# Altium PCB QSTL_24DC_4MW_PCB.PcbDoc
Units mm, origin at the board's own origin, x right, y up, seen from the top; angles counter-clockwise.
Board outline 19.5 x 67.9 mm, 6 copper layers (L1_GND, L2_DC_A, L3_GND, L4_DC_B, L5_GND, L6_RF_QD), stack 1.588 mm thick; 22 components, 37 nets, 149 pads, 528 vias.
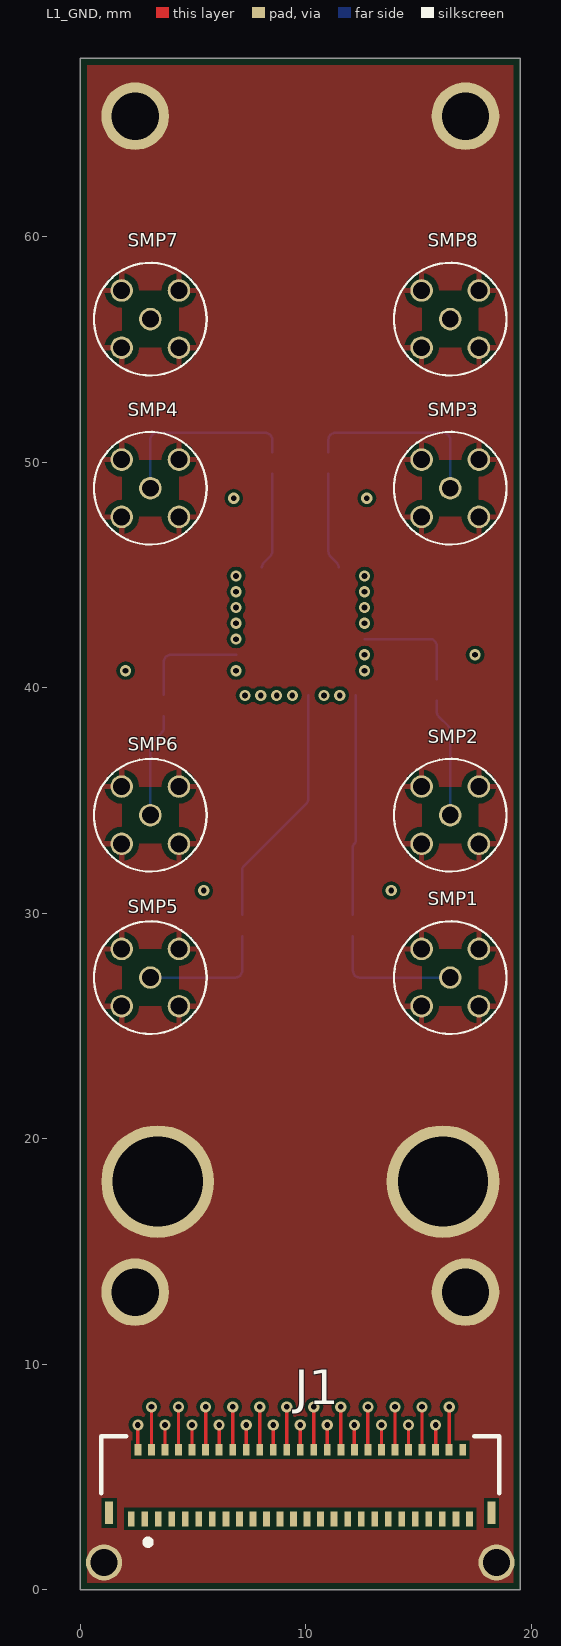
[diagram p0: L1_GND view]
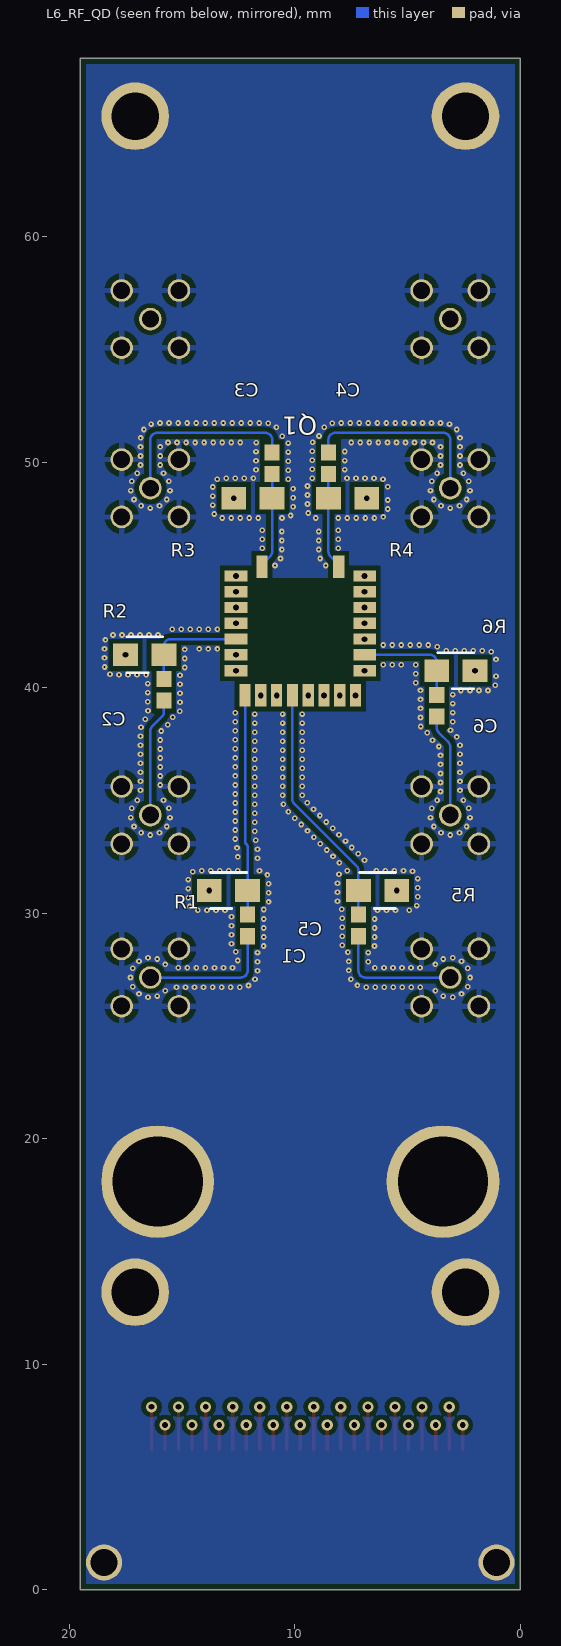
[diagram p1: L6_RF_QD view, seen from below]
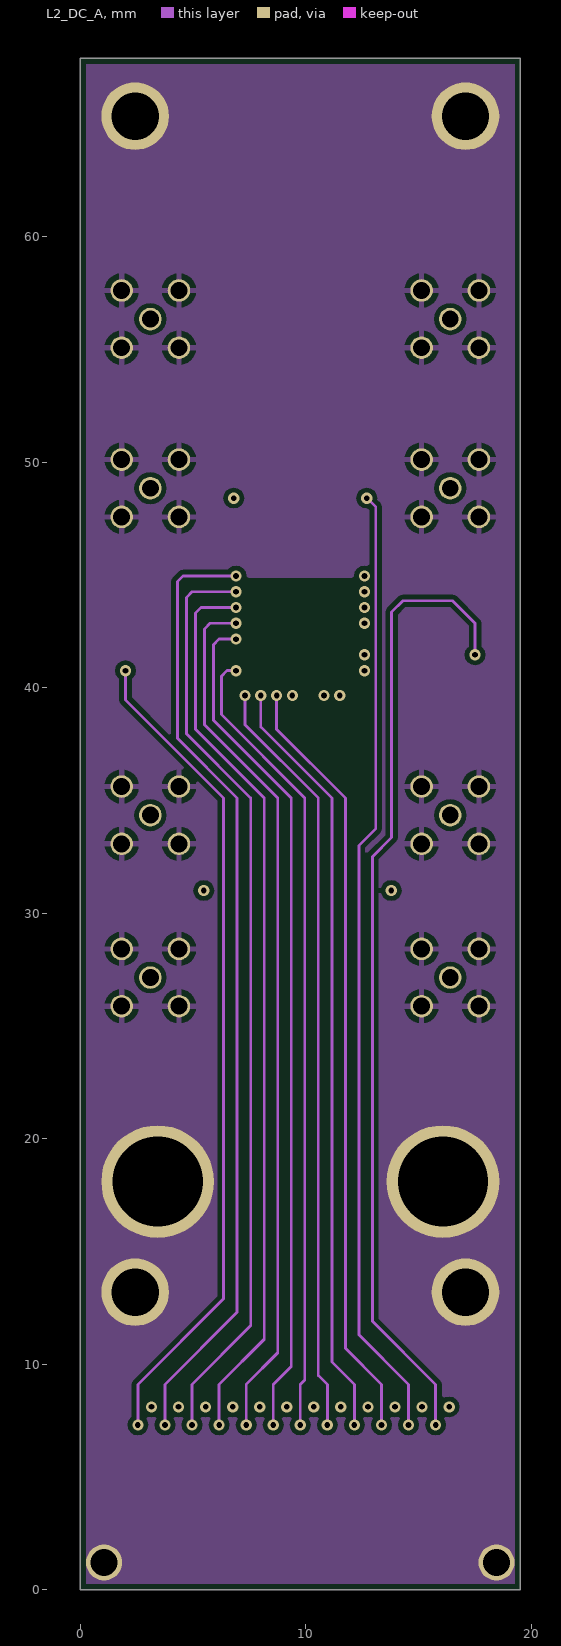
[diagram p2: L2_DC_A]
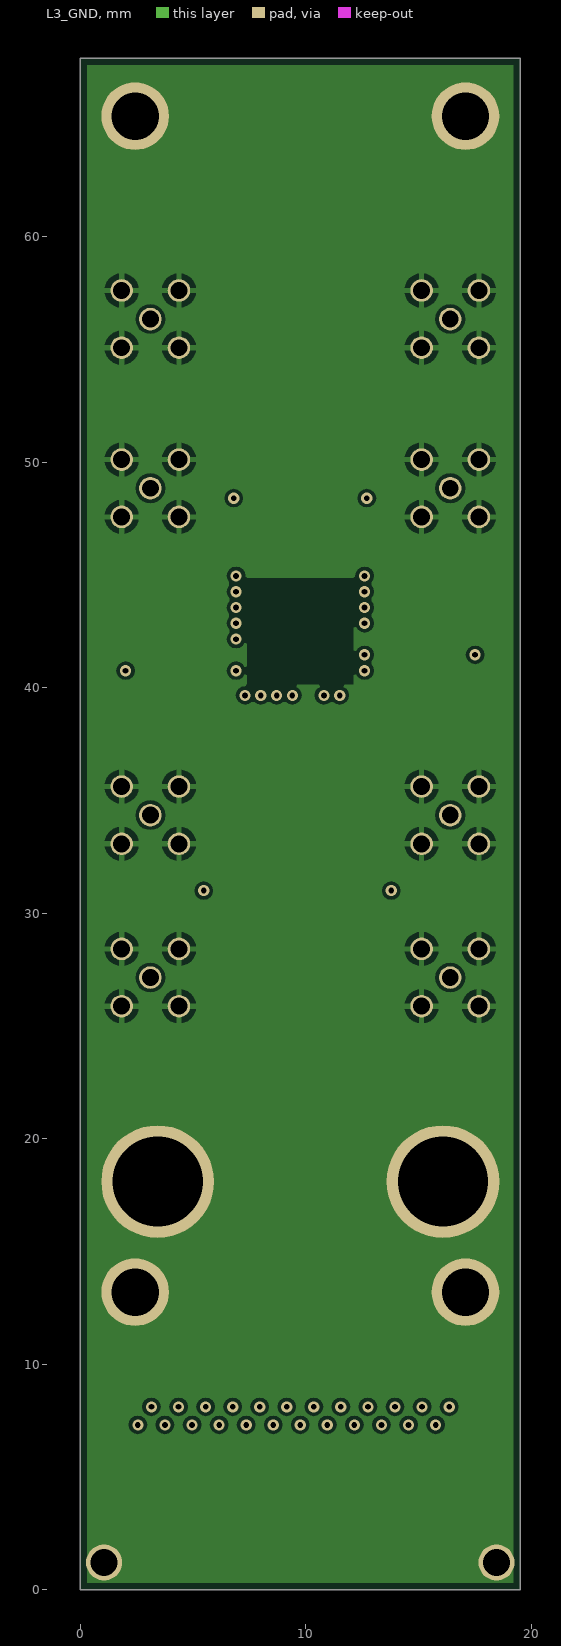
[diagram p3: L3_GND]
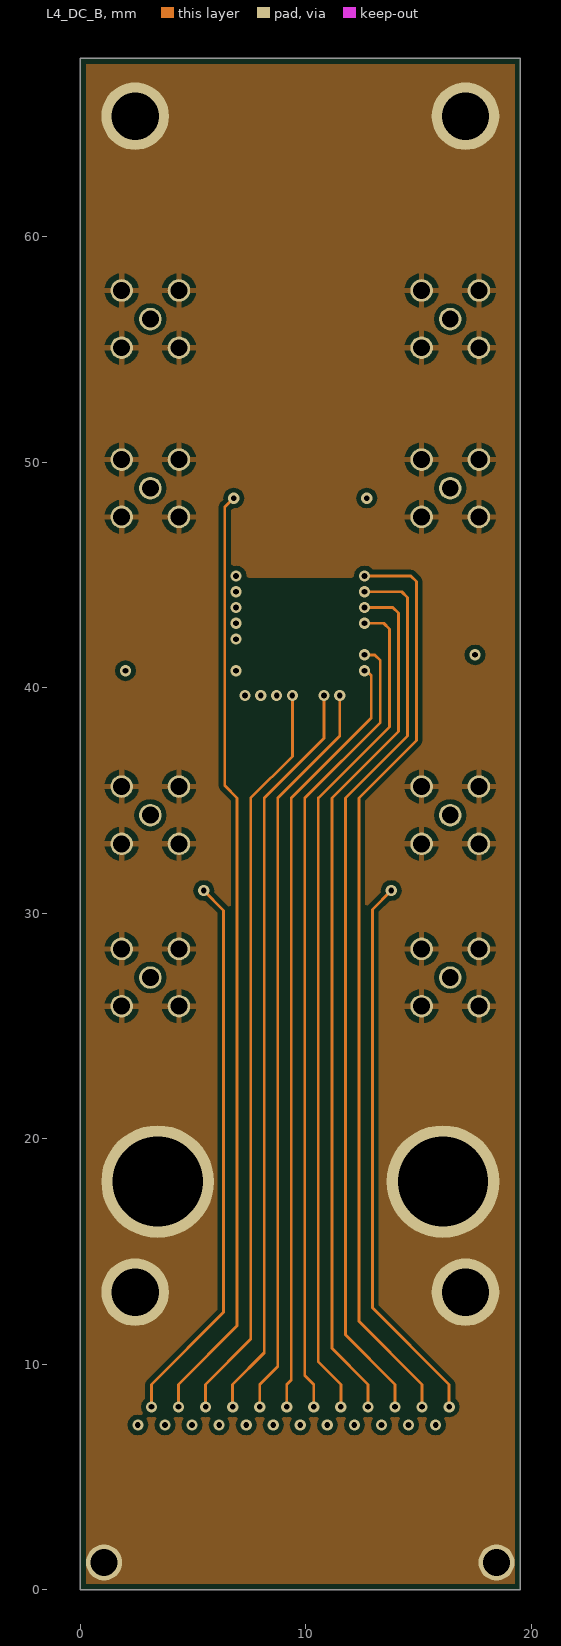
[diagram p4: L4_DC_B]
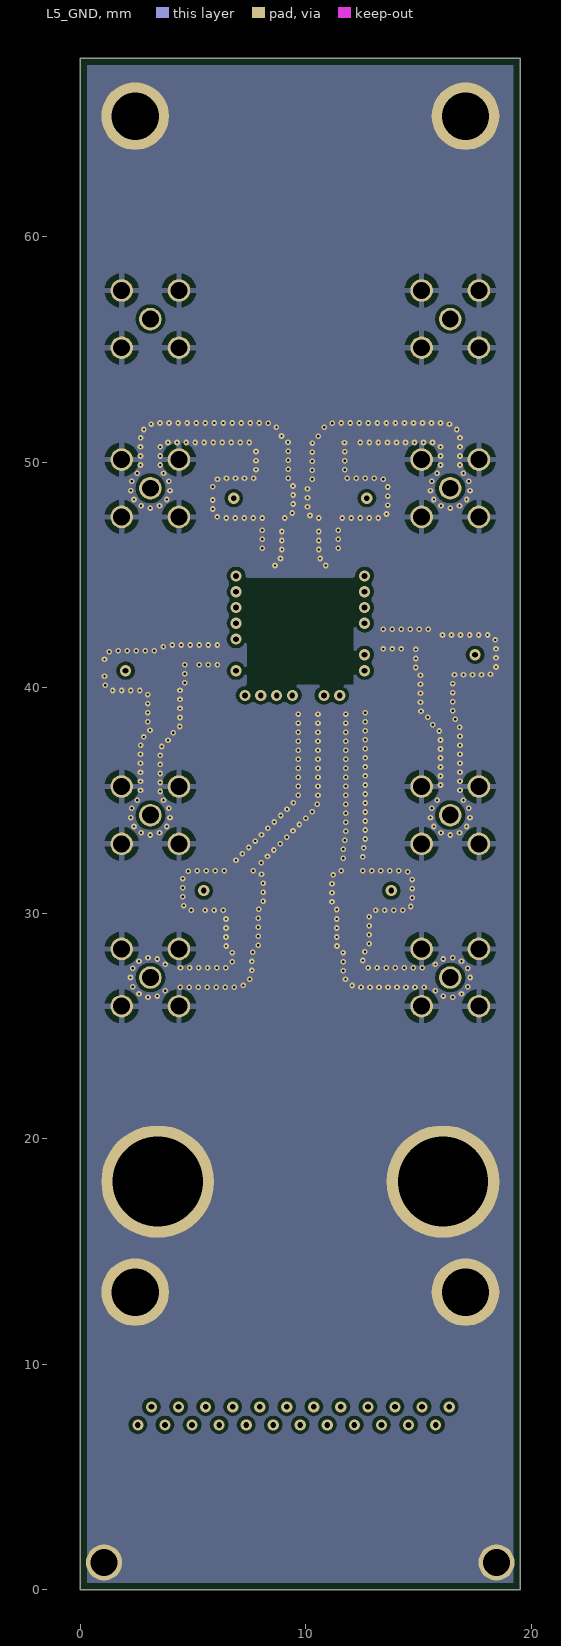
[diagram p5: L5_GND]
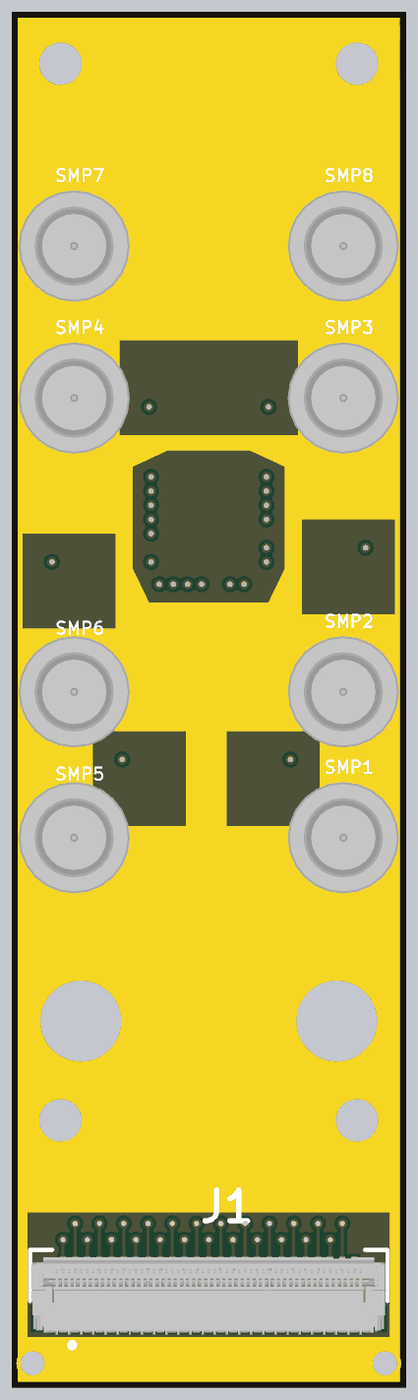
[diagram p6: 3D render of the assembled board from above, using the file's embedded part models]
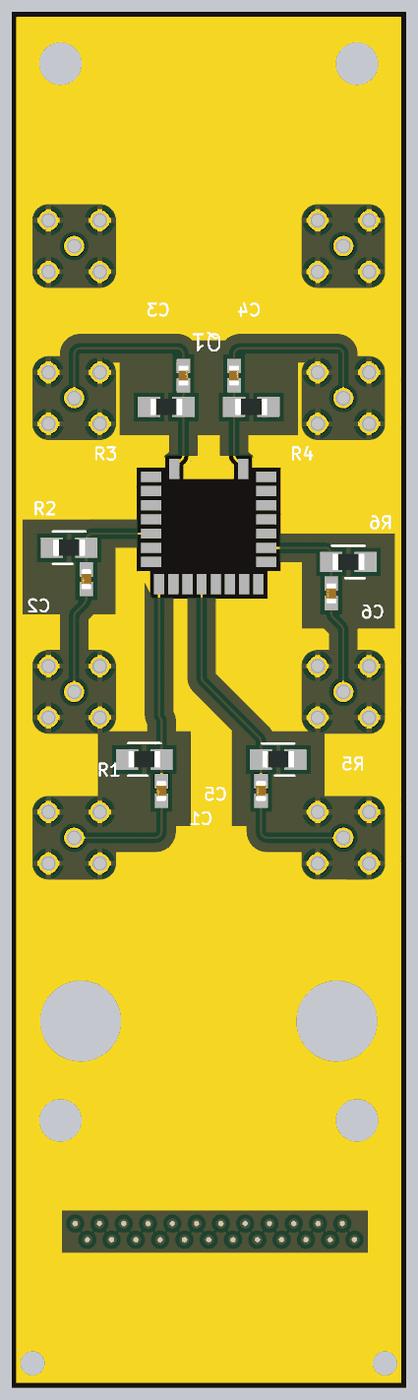
[diagram p7: 3D render of the assembled board from below, using the file's embedded part models]

## Layer stack, top to bottom
Top Solder: solder mask 0.0102, Solder Resist, Dk 3.5
L1_GND: signal copper 0.035
Dielectric 1: dielectric 0.0784, 1078RC69%, Dk 4.8
L2_DC_A: signal copper 0.0152
Dielectric2: dielectric 0.55, 0.55mm H/HOZ CORE, Dk 4.8
L3_GND: signal copper 0.0152
Dielectric3: dielectric 0.2008, 7628RC50%, Dk 4.8
L4_DC_B: signal copper 0.0152
Dielectric4: dielectric 0.55, 0.55mm H/HOZ CORE, Dk 4.8
L5_GND: signal copper 0.0152
Dielectric5: dielectric 0.0784, 1078RC69%, Dk 4.8
L6_RF_QD: signal copper 0.035
Bottom Solder: solder mask 0.0102, Solder Resist, Dk 3.5

## Board outline
0,0 19.5,0 19.5,67.9 0,67.9

## Design rules (kind name [scope] priority, off if disabled: settings)
Clearance DC_GND_GAP_0P2 [InNet('GND') And (OnLayer('L2_DC_A') Or OnLayer('L4_DC_B'))] p1: gap=0.2 ignorepadtopadclearanceinfootprint=FALSE // L2 and L4 GND pour clearance to signal copper: 0.20 mm.
Clearance RF_CPW_GND_GAP_0P2 [InNet('GND') And OnLayer('L6_RF_QD')] p2: gap=0.2 ignorepadtopadclearanceinfootprint=FALSE
Clearance [Not (InNet('GND') And OnLayer('L6_RF_QD')) And Not (InNet('GND') And (OnLayer('L2_DC_A') Or OnLayer('L4_DC_B'))) vs Not (InNet('GND') And OnLayer('L6_RF_QD')) And Not (InNet('GND') And (OnLayer('L2_DC_A') Or OnLayer('L4_DC_B')))] p3: gap=0.15 ignorepadtopadclearanceinfootprint=FALSE
HoleSize [All] p1: absolutevalues=TRUE maxlimit=4.1 minlimit=0.025 maxpercent=80.000 minpercent=20.000
MinimumSolderMaskSliver [All] p1: minsoldermaskwidth=0.1
PolygonConnect ZIF24V2_GND_VIA_SOLID [(IsVia Or (IsPad And Not InComponent('*'))) And InNet('GND')] p1: connectstyle=Direct reliefconductorwidth=0.254 reliefentries=4 polygonreliefangle="90 Angle" airgapwidth=0.254 // Solid GND shield vias and free mounting pads; component pads retain their rules.
PolygonConnect [All] p2: connectstyle=Relief reliefconductorwidth=0.254 reliefentries=4 polygonreliefangle="90 Angle" airgapwidth=0.254
RoutingLayers [All] p1: top layer_v5=TRUE mid layer 1_v5=TRUE mid layer 2_v5=FALSE mid layer 3_v5=TRUE mid layer 4_v5=FALSE bottom layer_v5=TRUE // RF on Bottom with QD; DC on L2/L4, with short Top ZIF pad escapes. L1/L3/L5 GND.
RoutingVias RF_SHIELD_L5_L6 [IsVia And InNet('GND')] p1: holewidth=0.1 width=0.25 viastyle="Blind Buried (Adjacent Layers)" minholewidth=0.1 minwidth=0.25 maxholewidth=0.1 maxwidth=0.25
RoutingVias [Not (IsVia And InNet('GND'))] p2: holewidth=0.25 width=0.5 viastyle="Through Hole" minholewidth=0.25 minwidth=0.5 maxholewidth=0.25 maxwidth=0.5
SilkToSolderMaskClearance [IsPad] p1: minsilkscreentomaskgap=0.15 clearancetoexposedcopper=TRUE
SolderMaskExpansion [All] p1: expansion=0.05 istentingtop=FALSE
Width RF_50OHM_WIDTH [OnLayer('L6_RF_QD')] p1: maxlimit=0.11 minlimit=0.11 preferedwidth=0.11
Width [Not OnLayer('L6_RF_QD')] p2: maxlimit=0.254 minlimit=0.125 preferedwidth=0.15 minimp=50.000000 maximp=50.000000 favimp=50.000000
26 further rules are at their usual default settings.

## Classes and differential pairs
component class QSTL_24DC_4MW_PCB: Q1

## Components (designator, comment, footprint, x,y, rotation, side; value= is the part's Value field where it differs from the comment)
C1 "1nF / 0402" FP-GCM155-0_05-IPC_A#1 12.085,29.45 r90 bottom
C2 "1nF / 0402" FP-GCM155-0_05-IPC_A#2 15.8,39.9 r90 bottom
C3 "1nF / 0402" FP-GCM155-0_05-IPC_A#2 11,49.95 r270 bottom
C4 "1nF / 0402" FP-GCM155-0_05-IPC_A#2 8.5,49.95 r270 bottom
C5 "1nF / 0402" FP-GCM155-0_05-IPC_A#1 7.17,29.45 r90 bottom
C6 "1nF / 0402" FP-GCM155-0_05-IPC_A#2 3.7,39.2 r90 bottom
J1 "5025985193" FP-5025985193-MFG 9.75,4.85 r0 top
Q1 "" QD4 9.75,42.5 r0 bottom
R1 "10k / 0603" CC1608-0603 12.928,31.001 r0 bottom
R2 "10k / 0603" CC1608-0603 16.643,41.451 r0 bottom
R3 "10k / 0603" CC1608-0603 11.843,48.401 r0 bottom
R4 "10k / 0603" CC1608-0603 7.657,48.399 r180 bottom
R5 "10k / 0603" CC1608-0603 6.327,30.999 r180 bottom
R6 "10k / 0603" CC1608-0603 2.857,40.749 r180 bottom
SMP1 "SMP" RF_Con 16.4,27.14 r0 top
SMP2 "SMP" RF_Con 16.4,34.34 r0 top
SMP3 "SMP" RF_Con 16.4,48.84 r0 top
SMP4 "SMP" RF_Con 3.1,48.84 r0 top
SMP5 "SMP" RF_Con 3.1,27.14 r180 top
SMP6 "SMP" RF_Con 3.1,34.34 r180 top
SMP7 "SMP" RF_Con 3.1,56.34 r0 top
SMP8 "SMP" RF_Con 16.4,56.34 r0 top

## Footprints (in the part's own frame and the unit in brackets; to place one, negate y for a bottom-side part, rotate by r counter-clockwise, add the part's x,y. Pads: shape width x height; smd on the part's side, far side on the other; paste and mask are expansions set on the pad)
CC1608-0603 [mm]
  rect 1.1x1 smd mask+0: 1(-0.843,0.001) 2(0.857,0.001)
  silkscreen extent -0.8,-0.8 0.8,0.8, body extent -0.79,-0.4 0.81,0.4, height 0.45
FP-5025985193-MFG [mm]
  rect 0.3x0.67 smd paste+0 mask+0: 1(-7.5,-1.715) 3(-6.9,-1.715) 5(-6.3,-1.715) 7(-5.7,-1.715) 9(-5.1,-1.715) 11(-4.5,-1.715) 13(-3.9,-1.715) 15(-3.3,-1.715) 17(-2.7,-1.715) 19(-2.1,-1.715) 21(-1.5,-1.715) 23(-0.9,-1.715) 25(-0.3,-1.715) 27(0.3,-1.715) 29(0.9,-1.715) 31(1.5,-1.715) 33(2.1,-1.715) 35(2.7,-1.715) 37(3.3,-1.715) 39(3.9,-1.715) 41(4.5,-1.715) 43(5.1,-1.715) 45(5.7,-1.715) 47(6.3,-1.715) 49(6.9,-1.715) 51(7.5,-1.715)
  rect 0.3x0.5 smd paste+0 mask+0: 2(-7.2,1.35) 4(-6.6,1.35) 6(-6,1.35) 8(-5.4,1.35) 10(-4.8,1.35) 12(-4.2,1.35) 14(-3.6,1.35) 16(-3,1.35) 18(-2.4,1.35) 20(-1.8,1.35) 22(-1.2,1.35) 24(-0.6,1.35) 26(0,1.35) 28(0.6,1.35) 30(1.2,1.35) 32(1.8,1.35) 34(2.4,1.35) 36(3,1.35) 38(3.6,1.35) 40(4.2,1.35) 42(4.8,1.35) 44(5.4,1.35) 46(6,1.35) 48(6.6,1.35) 50(7.2,1.35)
  rect 0.35x1 smd paste+0 mask+0: 52(-8.475,-1.45) 53(8.475,-1.45)
  silkscreen extent -8.83,-2.87 8.82,1.95, body extent -8.7,-2.23 8.7,1.57, height 1.26
FP-GCM155-0_05-IPC_A#1 [mm]
  rect 0.715x0.672 smd paste+0 mask+0: 1(-0.479,0)
  rect 0.715x0.672 smd paste+0 mask+0.05: 2(0.479,0)
  body extent -0.5,-0.25 0.5,0.25, height 0.55
FP-GCM155-0_05-IPC_A#2 [mm]
  rect 0.715x0.672 smd paste+0 mask+0: 1(-0.479,0) 2(0.479,0)
  body extent -0.5,-0.25 0.5,0.25, height 0.55
QD4 [mm]
  rect 0.5x1 smd mask+0: 1(1.7,-2.85) 9(2.45,2.85) 10(1.75,2.85) 11(1.05,2.85) 12(0.35,2.85) 13(-0.35,2.85) 14(-1.05,2.85) 15(-1.75,2.85) 16(-2.45,2.85) 24(-1.7,-2.85)
  rect 1x0.5 smd mask+0: 2(2.85,-2.45) 3(2.85,-1.75) 4(2.85,-1.05) 5(2.85,-0.35) 6(2.85,0.35) 7(2.85,1.05) 8(2.85,1.75) 17(-2.85,1.75) 18(-2.85,1.05) 19(-2.85,0.35) 20(-2.85,-0.35) 21(-2.85,-1.05) 22(-2.85,-1.75) 23(-2.85,-2.45)
RF_Con [mm]
  round 1 hole 0.75 paste-2539.97: 1(0,0) 2(-1.27,-1.27) 3(1.27,-1.27) 4(1.27,1.27) 5(-1.27,1.27)
  L1_GND pour cut-out: -1.25,1.25 1.25,1.25 1.25,-1.25 -1.25,-1.25
  silkscreen extent -2.5,-2.5 2.5,2.5, body extent -2.75,-2.74 2.75,2.74, height 5.4

## Part data
C1 C2 C3 C4 C5 C6: library part CMP-06035-056113-1
J1: library part ZIF_5025985193_53, "CONN FPC 51POS 0.30MM R/A"
Q1: library part QD4

## Free pads (board coordinates)
  round 3 hole 2.1 paste-2539.97: 1(2.425,13.19) 1(2.425,65.34) 1(17.075,13.19) 1(17.075,65.34)
  round 5 hole 4 paste-2539.97: 1(3.425,18.09) 1(16.075,18.09)
  round 1.6 hole 1.2: MH7(1.05,1.2) MH8(18.45,1.2)

## Via types
v1: diameter 0.25, hole 0.1, L5_GND to L6_RF_QD, tented both sides, 480 vias
v2: diameter 0.5, hole 0.25, L1_GND to L6_RF_QD, tented both sides, 48 vias

## Nets (pads, with @x,y where several pads share a name; then routed paths per layer and width w, separated by ;. In a path a pad name is that pad's centre, name@x,y a point inside that pad or via, vN(x,y) a via of type N, cw(c..) or ccw(c..) an arc to the next point about the centre after c; other vN are vias at no path point)
GND: pad.1 pad.MH7 pad.MH8 SMP1.2 SMP1.3 SMP1.4 SMP1.5 SMP2.2 SMP2.3 SMP2.4 SMP2.5 SMP3.2 SMP3.3 SMP3.4 SMP3.5 SMP4.2 SMP4.3 SMP4.4 SMP4.5 SMP5.2 SMP5.3 SMP5.4 SMP5.5 SMP6.2 SMP6.3 SMP6.4 SMP6.5 SMP7.2 SMP7.3 SMP7.4 SMP7.5 SMP8.2 SMP8.3 SMP8.4 SMP8.5
  other v1: 2.994,26.266 16.506,26.266 3.412,26.317 16.088,26.317 2.6,26.416 16.9,26.416 3.759,26.556 15.741,26.556 4.427,26.705 4.827,26.705 5.227,26.705 5.627,26.705 6.027,26.705 6.427,26.705 6.827,26.705 12.44,26.705 12.84,26.705 13.24,26.705 13.64,26.705 14.04,26.705 14.44,26.705 14.84,26.705 15.24,26.705 2.321,26.731 17.179,26.731 7.217,26.792 12.048,26.787 11.756,27.06 7.505,27.07 2.22,27.14 17.28,27.14 7.605,27.457 11.65,27.445 2.321,27.549 17.179,27.549 4.44,27.575 4.84,27.575 5.24,27.575 5.64,27.575 6.04,27.575 6.44,27.575 12.757,27.575 13.157,27.575 13.557,27.575 13.957,27.575 14.357,27.575 14.757,27.575 15.157,27.575 3.759,27.724 15.741,27.724 6.735,27.845 11.65,27.845 2.6,27.864 7.605,27.857 16.9,27.864 12.52,27.897 3.412,27.963 16.088,27.963 2.994,28.014 16.506,28.014 6.733,28.247 7.637,28.257 11.649,28.247 12.616,28.288 6.461,28.54 11.376,28.54 7.884,28.572 12.801,28.642 6.454,28.94 11.369,28.939 7.886,28.972 12.801,29.042 6.454,29.34 11.369,29.339 7.886,29.372 12.801,29.442 6.454,29.74 11.369,29.739 7.886,29.772 12.801,29.842 4.92,30.12 5.528,30.12 5.928,30.12 6.328,30.12 13.089,30.12 13.489,30.12 13.889,30.12 14.289,30.12 11.369,30.158 7.911,30.171 14.651,30.289 4.58,30.331 11.155,30.496 8.1,30.524 14.715,30.684 4.54,30.729 11.155,30.896 8.1,30.924 14.715,31.084 4.54,31.129 11.155,31.296 8.1,31.324 14.715,31.484 4.541,31.529 11.208,31.693 8.031,31.718 14.518,31.833 4.777,31.852 5.176,31.88 5.576,31.88 5.976,31.88 6.376,31.88 7.666,31.88 11.561,31.88 12.521,31.88 12.921,31.88 13.321,31.88 13.721,31.88 14.121,31.88 8.015,32.23 6.902,32.342 11.65,32.433 12.52,32.491 8.298,32.512 7.182,32.627 8.58,32.795 11.65,32.833 12.559,32.889 7.465,32.91 8.863,33.078 7.748,33.193 11.726,33.226 12.635,33.282 9.146,33.361 3.1,33.46 16.4,33.46 8.031,33.476 2.691,33.561 3.509,33.561 15.991,33.561 16.809,33.561 11.765,33.624 9.429,33.644 12.635,33.682 8.313,33.759 2.376,33.84 3.824,33.84 15.676,33.84 17.124,33.84 9.712,33.927 8.596,34.042 11.765,34.024 12.635,34.082 9.995,34.209 2.226,34.234 3.974,34.234 15.526,34.234 17.274,34.234 8.879,34.324 11.765,34.424 10.277,34.492 12.635,34.482 9.162,34.607 2.277,34.652 3.923,34.652 15.577,34.652 17.223,34.652 10.499,34.826 11.765,34.824 12.635,34.882 9.445,34.89 2.516,34.999 3.684,34.999 15.816,34.999 16.984,34.999 9.665,35.224 10.535,35.224 11.765,35.224 12.635,35.282 3.535,35.392 2.665,35.439 16.835,35.444 9.665,35.624 10.535,35.624 11.765,35.624 12.635,35.682 15.965,35.678 3.535,35.792 2.665,35.839 16.835,35.844 9.665,36.024 10.535,36.024 11.765,36.024 15.965,36.078 12.635,36.082 3.535,36.192 2.665,36.239 16.835,36.244 9.665,36.424 10.535,36.424 11.765,36.424 12.635,36.482 15.965,36.478 3.535,36.592 2.665,36.639 16.835,36.644 9.665,36.824 10.535,36.824 11.765,36.824 12.635,36.882 15.965,36.878 3.535,36.992 2.665,37.039 16.835,37.044 9.665,37.224 10.535,37.224 11.765,37.224 12.635,37.282 15.965,37.278 3.602,37.387 2.668,37.439 16.835,37.444 9.665,37.624 10.535,37.624 11.765,37.624 3.885,37.669 15.965,37.678 12.635,37.682 2.809,37.813 16.835,37.844 4.122,37.994 9.665,38.024 10.535,38.024 11.765,38.024 12.635,38.082 15.911,38.074 3.087,38.103 16.816,38.244 4.406,38.275 15.628,38.357 9.665,38.424 10.535,38.424 11.765,38.424 2.984,38.49 12.635,38.482 16.622,38.594 4.416,38.675 15.402,38.689 9.665,38.824 10.535,38.824 11.765,38.824 2.984,38.89 12.635,38.882 15.101,38.952 16.506,38.977 4.416,39.075 2.984,39.29 15.084,39.351 16.516,39.376 4.416,39.475 2.984,39.69 15.084,39.751 16.516,39.776 1.427,39.871 1.827,39.87 2.227,39.87 2.627,39.87 4.416,39.875 1.1,40.102 15.084,40.151 16.516,40.176 4.628,40.214 1.07,40.501 15.084,40.551 16.588,40.57 16.988,40.57 17.388,40.57 17.788,40.57 18.187,40.596 4.63,40.614 14.874,40.892 18.428,40.915 4.63,41.014 5.274,41.015 5.674,41.015 6.074,41.015 1.07,41.25 14.87,41.292 18.43,41.315 1.281,41.59 1.679,41.63 2.079,41.63 2.479,41.63 2.879,41.63 3.279,41.63 14.87,41.692 13.426,41.715 13.826,41.715 14.226,41.715 18.43,41.715 3.681,41.812 4.074,41.885 4.474,41.885 4.874,41.885 5.274,41.885 5.674,41.885 6.074,41.885 18.393,42.113 16.057,42.33 16.457,42.33 16.857,42.33 17.257,42.33 17.657,42.33 18.057,42.33 13.426,42.585 13.826,42.585 14.226,42.585 14.626,42.585 15.026,42.585 15.426,42.585 8.626,45.411 10.874,45.411 8.872,45.726 10.628,45.726 8.935,46.121 10.565,46.121 8.065,46.175 11.435,46.175 8.935,46.521 10.565,46.521 8.065,46.575 11.435,46.575 8.935,46.921 10.565,46.921 8.065,46.975 11.435,46.975 6.463,47.52 6.863,47.52 7.263,47.52 7.663,47.52 8.063,47.52 9.061,47.52 10.563,47.52 11.611,47.52 12.011,47.52 12.411,47.52 12.811,47.52 13.211,47.52 6.066,47.568 10.18,47.633 13.571,47.696 9.395,47.74 5.87,47.916 3.1,47.96 16.4,47.96 10.07,48.018 2.691,48.061 3.509,48.061 15.991,48.061 16.809,48.061 13.63,48.091 9.43,48.139 5.87,48.316 2.376,48.34 3.824,48.34 15.676,48.34 17.124,48.34 10.07,48.418 13.63,48.491 9.43,48.539 2.226,48.734 3.974,48.734 15.526,48.734 17.274,48.734 10.07,48.818 5.87,48.9 13.63,48.891 9.428,48.939 2.277,49.152 3.923,49.152 15.577,49.152 17.223,49.152 13.427,49.236 6.081,49.24 10.284,49.242 6.479,49.28 6.879,49.28 7.279,49.28 7.679,49.28 9.216,49.278 11.83,49.28 12.23,49.28 12.63,49.28 13.03,49.28 2.516,49.499 3.684,49.499 15.816,49.499 16.984,49.499 10.284,49.642 7.784,49.666 11.716,49.664 9.216,49.678 2.665,49.872 3.535,49.872 15.965,49.872 16.835,49.872 10.284,50.042 7.784,50.066 11.716,50.064 9.216,50.078 2.665,50.272 3.535,50.272 15.965,50.272 16.835,50.272 10.284,50.442 7.784,50.466 9.216,50.478 11.716,50.464 2.665,50.672 3.535,50.672 15.965,50.672 16.835,50.672 10.288,50.842 3.885,50.865 4.285,50.865 4.685,50.865 5.085,50.865 5.485,50.865 5.885,50.865 6.285,50.865 6.685,50.865 7.085,50.865 7.485,50.865 9.205,50.878 11.708,50.864 12.415,50.865 12.815,50.865 13.215,50.865 13.615,50.865 14.015,50.865 14.415,50.865 14.815,50.865 15.215,50.865 15.615,50.865 2.669,51.072 16.831,51.072 8.918,51.157 10.546,51.147 2.815,51.444 16.685,51.444 8.69,51.548 10.81,51.548 3.134,51.685 16.366,51.685 8.331,51.723 11.169,51.723 3.531,51.735 3.931,51.735 4.331,51.735 4.731,51.735 5.131,51.735 5.531,51.735 5.931,51.735 6.331,51.735 6.731,51.735 7.131,51.735 7.531,51.735 7.931,51.735 11.569,51.735 11.969,51.735 12.369,51.735 12.769,51.735 13.169,51.735 13.569,51.735 13.969,51.735 14.369,51.735 14.769,51.735 15.169,51.735 15.569,51.735 15.969,51.735
MW1: C1.2 Q1.9 R1.1 | length 9.8
  L6_RF_QD w0.11: C1.2 12.085,32.938 cw(c12.235,32.938) 12.129,33.044 12.156,33.071 ccw(c12.05,33.177) 12.2,33.177 Q1.9
MW2: C2.2 Q1.6 R2.1 | length 4.8
  L6_RF_QD w0.11: Q1.6 15.5,42.15 cw(c15.5,41.85) 15.8,41.85 C2.2
MW3: C3.2 Q1.1 R3.1 | length 4.3
  L6_RF_QD w0.11: C3.2 11,46.024 ccw(c11.3,46.024) 11.088,45.812 11.362,45.538 cw(c11.15,45.326) 11.45,45.326 Q1.1
MW4: C4.2 Q1.24 R4.1 | length 4.3
  L6_RF_QD w0.11: Q1.24 8.05,45.326 cw(c8.35,45.326) 8.138,45.538 8.412,45.812 ccw(c8.2,46.024) 8.5,46.024 C4.2
MW5: C5.2 Q1.12 R5.1 | length 10.9
  L6_RF_QD w0.11: C5.2 7.17,31.876 cw(c7.47,31.876) 7.258,32.088 10.012,34.842 ccw(c9.8,35.054) 10.1,35.054 Q1.12
MW6: C6.2 Q1.18 R6.1 | length 4.8
  L6_RF_QD w0.11: C6.2 3.7,41.15 cw(c4,41.15) 4,41.45 Q1.18
S1: C1.1 SMP1.1 | length 6
  L6_RF_QD w0.11: C1.1 12.085,27.44 ccw(c12.385,27.44) 12.385,27.14 SMP1.1
S2: C2.1 SMP2.1 | length 5.3
  L6_RF_QD w0.11: C2.1 15.8,38.924 ccw(c16.1,38.924) 15.888,38.712 16.312,38.288 cw(c16.1,38.076) 16.4,38.076 SMP2.1
S3: C3.1 SMP3.1 | length 8.5
  L6_RF_QD w0.11: C3.1 11,51 cw(c11.3,51) 11.3,51.3 16.1,51.3 cw(c16.1,51) 16.4,51 SMP3.1
S4: C4.1 SMP4.1 | length 8.5
  L6_RF_QD w0.11: SMP4.1 3.1,51 cw(c3.4,51) 3.4,51.3 8.2,51.3 cw(c8.2,51) 8.5,51 C4.1
S5: C5.1 SMP5.1 | length 5.8
  L6_RF_QD w0.11: SMP5.1 6.87,27.14 ccw(c6.87,27.44) 7.17,27.44 C5.1
S6: C6.1 SMP6.1 | length 4.6
  L6_RF_QD w0.11: SMP6.1 3.1,37.376 cw(c3.4,37.376) 3.188,37.588 3.612,38.012 ccw(c3.4,38.224) 3.7,38.224 C6.1
ZIF02: J1.2 R6.2 | length 37.9
  L1_GND w0.15: J1.2 v2(2.55,7.3)
  L2_DC_A w0.125: v2(2,40.75) 2,39.45 6.35,35.1 6.35,20 6.35,12.9 2.55,9.1 v2(2.55,7.3)
ZIF04: J1.4 R5.2 | length 26.5
  L1_GND w0.15: J1.4 v2(3.15,8.1)
  L4_DC_B w0.125: v2(3.15,8.1) 3.15,9.1 6.35,12.3 6.35,20 6.35,30.12 v2(5.47,31)
ZIF06: J1.6 Q1.23 | length 43.6
  L1_GND w0.15: J1.6 v2(3.75,7.3)
  L2_DC_A w0.125: v2(3.75,7.3) 3.75,9.1 6.95,12.3 6.95,20 6.95,35.1 4.3,37.75 4.3,44.7 4.55,44.95 v2(6.9,44.95)
ZIF08: J1.8 R4.2 | length 43.7
  L1_GND w0.15: J1.8 v2(4.35,8.1)
  L4_DC_B w0.125: v2(4.35,8.1) 4.35,9.1 6.95,11.7 6.95,20 6.95,35.1 6.4,35.65 6.4,48 v2(6.8,48.4)
ZIF10: J1.10 Q1.22 | length 42.4
  L1_GND w0.15: J1.10 v2(4.95,7.3)
  L2_DC_A w0.125: v2(4.95,7.3) 4.95,9.1 7.55,11.7 7.55,20 7.55,35.1 4.7,37.95 4.7,44 4.95,44.25 v2(6.9,44.25)
ZIF12: J1.12 Q1.13 | length 35
  L1_GND w0.15: J1.12 v2(5.55,8.1)
  L4_DC_B w0.125: v2(5.55,8.1) 5.55,9.1 7.55,11.1 7.55,20 7.55,35.1 9.4,36.95 v2(9.4,39.65)
ZIF14: J1.14 Q1.21 | length 41.1
  L1_GND w0.15: J1.14 v2(6.15,7.3)
  L2_DC_A w0.125: v2(6.15,7.3) 6.15,9.1 8.15,11.1 8.15,20 8.15,35.1 5.1,38.15 5.1,43.3 5.35,43.55 v2(6.9,43.55)
ZIF16: J1.16 Q1.11 | length 35.1
  L1_GND w0.15: J1.16 v2(6.75,8.1)
  L4_DC_B w0.125: v2(6.75,8.1) 6.75,9.1 8.15,10.5 8.15,20 8.15,35.1 10.8,37.75 v2(10.8,39.65)
ZIF18: J1.18 Q1.20 | length 39.8
  L1_GND w0.15: J1.18 v2(7.35,7.3)
  L2_DC_A w0.125: v2(6.9,42.85) 5.75,42.85 5.5,42.6 5.5,38.35 8.75,35.1 8.75,20 8.75,10.5 7.35,9.1 v2(7.35,7.3)
ZIF20: J1.20 Q1.10 | length 34.9
  L1_GND w0.15: J1.20 v2(7.95,8.1)
  L4_DC_B w0.125: v2(7.95,8.1) 7.95,9.1 8.75,9.9 8.75,20 8.75,35.1 11.5,37.85 v2(11.5,39.65)
ZIF22: J1.22 Q1.19 | length 38.6
  L1_GND w0.15: J1.22 v2(8.55,7.3)
  L2_DC_A w0.125: v2(6.9,42.15) 6.15,42.15 5.9,41.9 5.9,38.55 9.35,35.1 9.35,20 9.35,9.9 8.55,9.1 v2(8.55,7.3)
ZIF24: J1.24 Q1.8 | length 36.3
  L1_GND w0.15: J1.24 v2(9.15,8.1)
  L4_DC_B w0.125: v2(9.15,8.1) 9.15,9.1 9.35,9.3 9.35,20 9.35,35.1 12.9,38.65 12.9,40.53 12.68,40.75 v2(12.6,40.75)
ZIF26: J1.26 Q1.17 | length 36.7
  L1_GND w0.15: J1.26 v2(9.75,7.3)
  L2_DC_A w0.125: v2(6.9,40.75) 6.5,40.75 6.25,40.5 6.25,38.8 9.95,35.1 9.95,20 9.95,9.3 9.75,9.1 v2(9.75,7.3)
ZIF28: J1.28 Q1.7 | length 37.4
  L1_GND w0.15: J1.28 v2(10.35,8.1)
  L4_DC_B w0.125: v2(10.35,8.1) 10.35,9.1 9.95,9.5 9.95,20 9.95,35.1 13.3,38.45 13.3,41.2 13.05,41.45 v2(12.6,41.45)
ZIF30: J1.30 Q1.16 | length 35
  L1_GND w0.15: J1.30 v2(10.95,7.3)
  L2_DC_A w0.125: v2(7.3,39.65) 7.3,38.35 10.55,35.1 10.55,20 10.55,9.5 10.95,9.1 v2(10.95,7.3)
ZIF32: J1.32 Q1.5 | length 39.3
  L1_GND w0.15: J1.32 v2(11.55,8.1)
  L4_DC_B w0.125: v2(11.55,8.1) 11.55,9.1 10.55,10.1 10.55,20 10.55,35.1 13.7,38.25 13.7,42.6 13.45,42.85 v2(12.6,42.85)
ZIF34: J1.34 Q1.15 | length 35.2
  L1_GND w0.15: J1.34 v2(12.15,7.3)
  L2_DC_A w0.125: v2(8,39.65) 8,38.25 11.15,35.1 11.15,20 11.15,10.1 12.15,9.1 v2(12.15,7.3)
ZIF36: J1.36 Q1.4 | length 40.6
  L1_GND w0.15: J1.36 v2(12.75,8.1)
  L4_DC_B w0.125: v2(12.6,43.55) 13.85,43.55 14.1,43.3 14.1,38.05 11.15,35.1 11.15,20 11.15,10.7 12.75,9.1 v2(12.75,8.1)
ZIF38: J1.38 Q1.14 | length 35.4
  L1_GND w0.15: J1.38 v2(13.35,7.3)
  L2_DC_A w0.125: v2(8.7,39.65) 8.7,38.15 11.75,35.1 11.75,20 11.75,10.7 13.35,9.1 v2(13.35,7.3)
ZIF40: J1.40 Q1.3 | length 41.9
  L1_GND w0.15: J1.40 v2(13.95,8.1)
  L4_DC_B w0.125: v2(12.6,44.25) 14.25,44.25 14.5,44 14.5,37.85 11.75,35.1 11.75,20 11.75,11.3 13.95,9.1 v2(13.95,8.1)
ZIF42: J1.42 R3.2 | length 43.6
  L1_GND w0.15: J1.42 v2(14.55,7.3)
  L2_DC_A w0.125: v2(12.7,48.4) 13.1,48 13.1,33.75 12.35,33 12.35,20 12.35,11.3 14.55,9.1 v2(14.55,7.3)
ZIF44: J1.44 Q1.2 | length 43.1
  L1_GND w0.15: J1.44 v2(15.15,8.1)
  L4_DC_B w0.125: v2(12.6,44.95) 14.65,44.95 14.9,44.7 14.9,37.65 12.35,35.1 12.35,20 12.35,11.9 15.15,9.1 v2(15.15,8.1)
ZIF46: J1.46 R2.2 | length 44.4
  L1_GND w0.15: J1.46 v2(15.75,7.3)
  L2_DC_A w0.125: v2(15.75,7.3) 15.75,9.1 12.95,11.9 12.95,20 12.95,32.5 13.8,33.35 13.8,43.35 14.3,43.85 16.5,43.85 17.5,42.85 v2(17.5,41.45)
ZIF48: J1.48 R1.2 | length 26.6
  L1_GND w0.15: J1.48 v2(16.35,8.1)
  L4_DC_B w0.125: v2(13.785,31) 12.95,30.165 12.95,20 12.95,12.5 16.35,9.1 v2(16.35,8.1)
pads on no net: J1.1 J1.3 J1.5 J1.7 J1.9 J1.11 J1.13 J1.15 J1.17 J1.19 J1.21 J1.23 J1.25 J1.27 J1.29 J1.31 J1.33 J1.35 J1.37 J1.39 J1.41 J1.43 J1.45 J1.47 J1.49 J1.50 J1.51 J1.52 J1.53 SMP7.1 SMP8.1

## Polygon pours and split planes (outlines as drawn)
GND on L3_GND "DRAFT_GND_L3" (solid, remove dead copper, pour order 1): 0.3,0.3 19.2,0.3 19.2,67.6 0.3,67.6
GND on L5_GND "DRAFT_GND_L5" (solid, remove dead copper, pour order 2): 0.3,0.3 19.2,0.3 19.2,67.6 0.3,67.6
GND on L6_RF_QD "L6_RF_COPLANAR_GND" (solid, remove dead copper, pour order 3): 0.25,0.25 19.25,0.25 19.25,67.65 0.25,67.65
GND on L1_GND "DRAFT_GND_L1" (solid, remove dead copper, pour order 0): 0.3,0.3 19.2,0.3 19.2,67.6 0.3,67.6
GND on L2_DC_A "L2_DC_GND" (solid, remove dead copper, pour order 4): 0.25,0.25 19.25,0.25 19.25,67.65 0.25,67.65
GND on L4_DC_B "L4_DC_GND" (solid, remove dead copper, pour order 5): 0.25,0.25 19.25,0.25 19.25,67.65 0.25,67.65

## Other copper
L2_DC_A:
  pour cut-out: 12.1,40.15 12.1,44.85 7.4,44.85 7.4,40.15
L3_GND:
  pour cut-out: 12.1,40.15 12.1,44.85 7.4,44.85 7.4,40.15
L4_DC_B:
  pour cut-out: 12.1,40.15 12.1,44.85 7.4,44.85 7.4,40.15
L5_GND:
  pour cut-out: 12.1,40.15 12.1,44.85 7.4,44.85 7.4,40.15
L6_RF_QD:
  pour cut-out: 12.1,40.15 12.1,44.85 7.4,44.85 7.4,40.15

## Silkscreen, mask and mechanical layers (free items; w line width, h text height)
Top Solder:
  region: 5 vertices and 11 holes, not listed, extent -0.05,-0.05 19.55,67.95
Bottom Solder:
  region: 5 vertices and 6 holes, not listed, extent -0.05,-0.05 19.55,67.95
Mechanical 2:
  lines w0.01: 7.6,40.85 ccw(c8.1,40.85) 8.1,40.35 11.4,40.35 ccw(c11.4,40.85) 11.9,40.85 11.9,44.15 ccw(c11.4,44.15) 11.4,44.65 8.1,44.65 ccw(c8.1,44.15) 7.6,44.15 7.6,40.85
Mechanical 3:
  text "BOTTOM BLIND SLOT: 4.3 x 4.3, R0.5, DEPTH 1.2 mm; NON-PLATED" at 21,43 h0.8